# Altium PCB SSR.PcbDoc
Units mm, origin at the board's own origin, x right, y up, seen from the top; angles counter-clockwise.
Board outline 60 x 55 mm, 2 copper layers (Top Layer, Bottom Layer), stack 1.57 mm thick; 21 components, 15 nets, 48 pads, 4 vias.
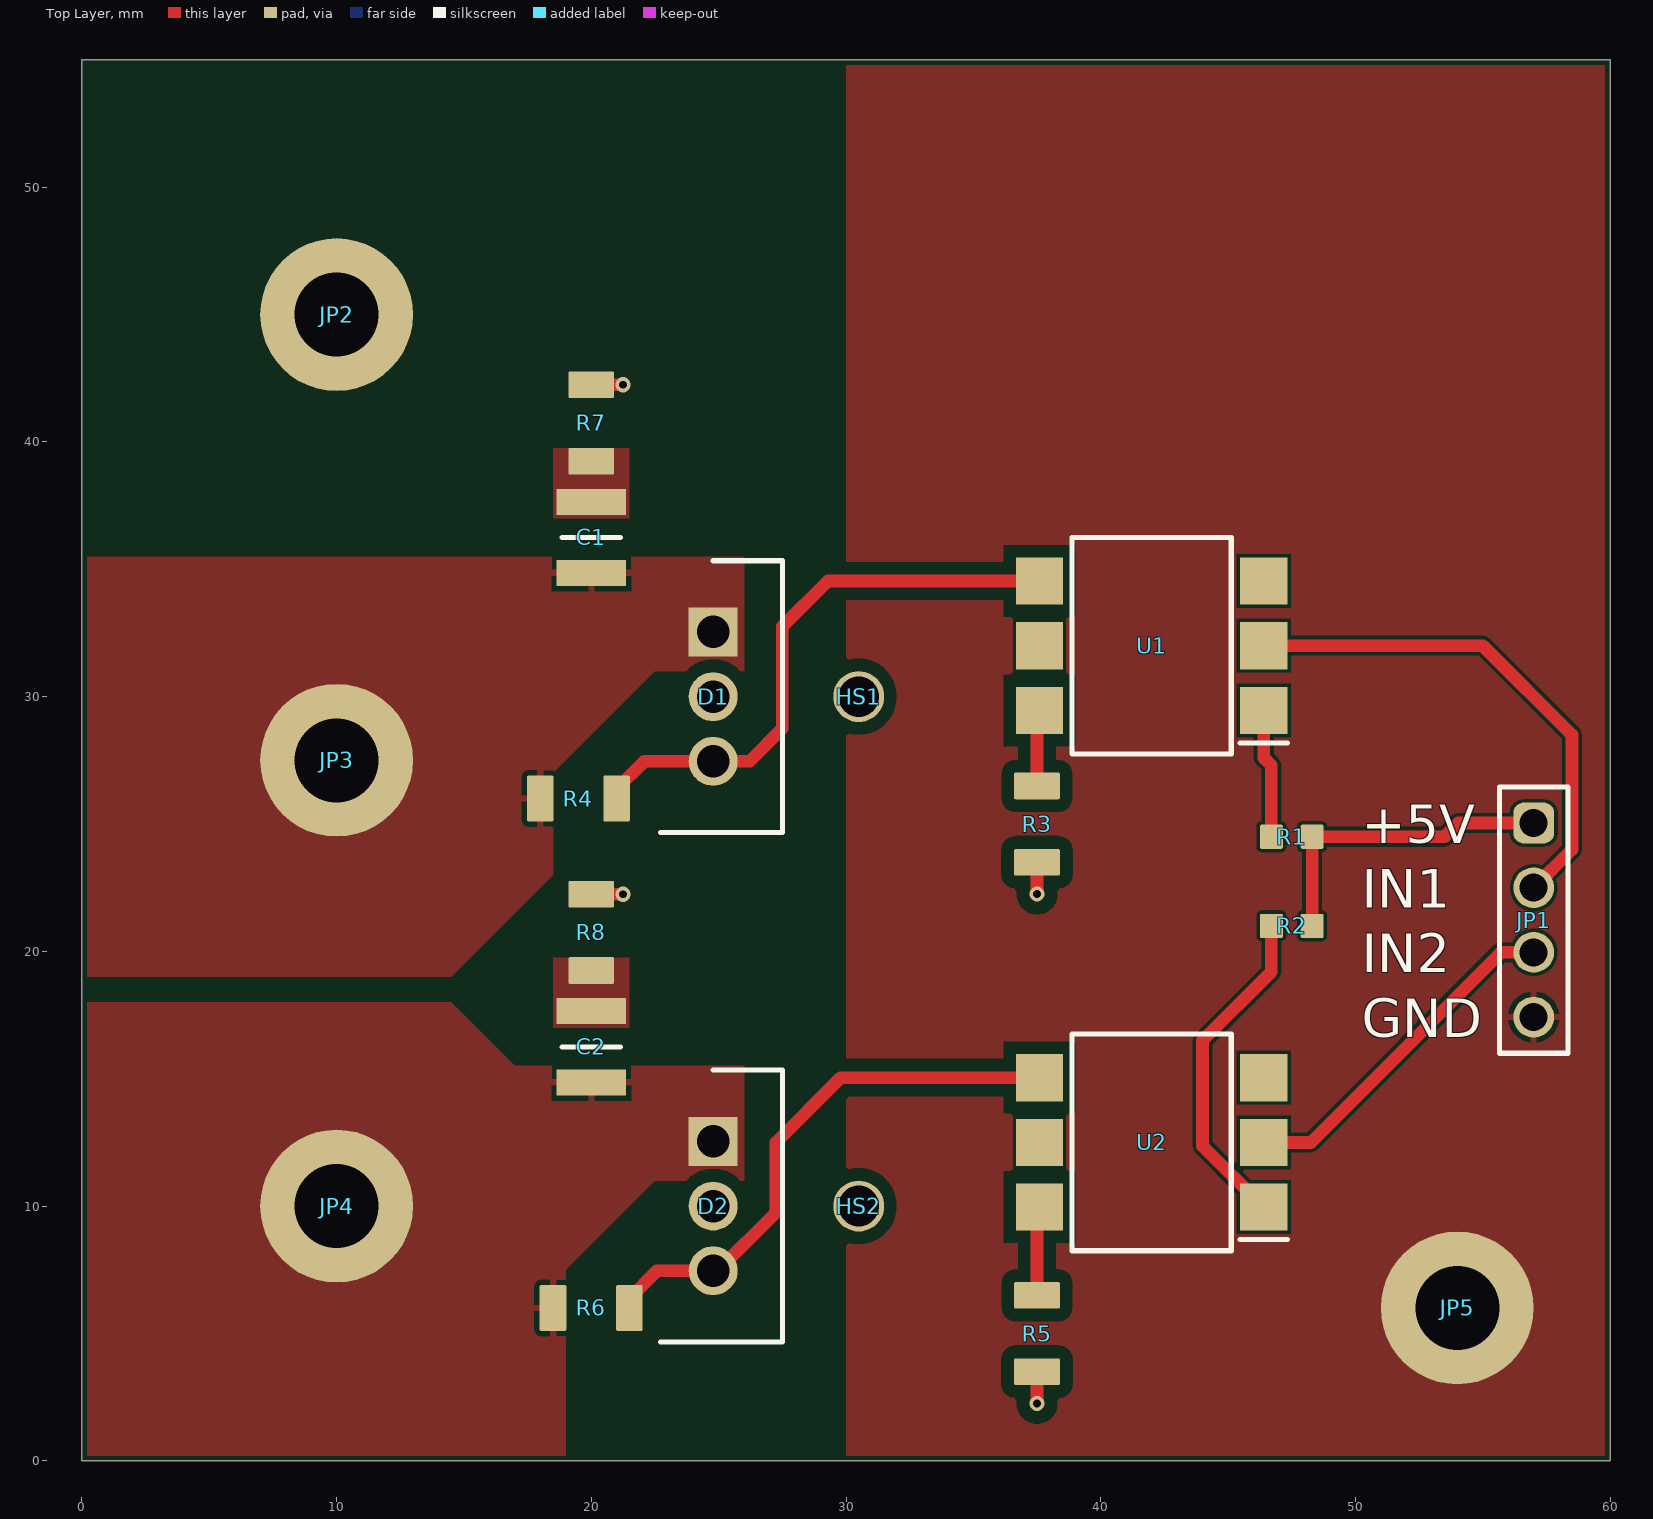
[diagram p0: Top Layer view]
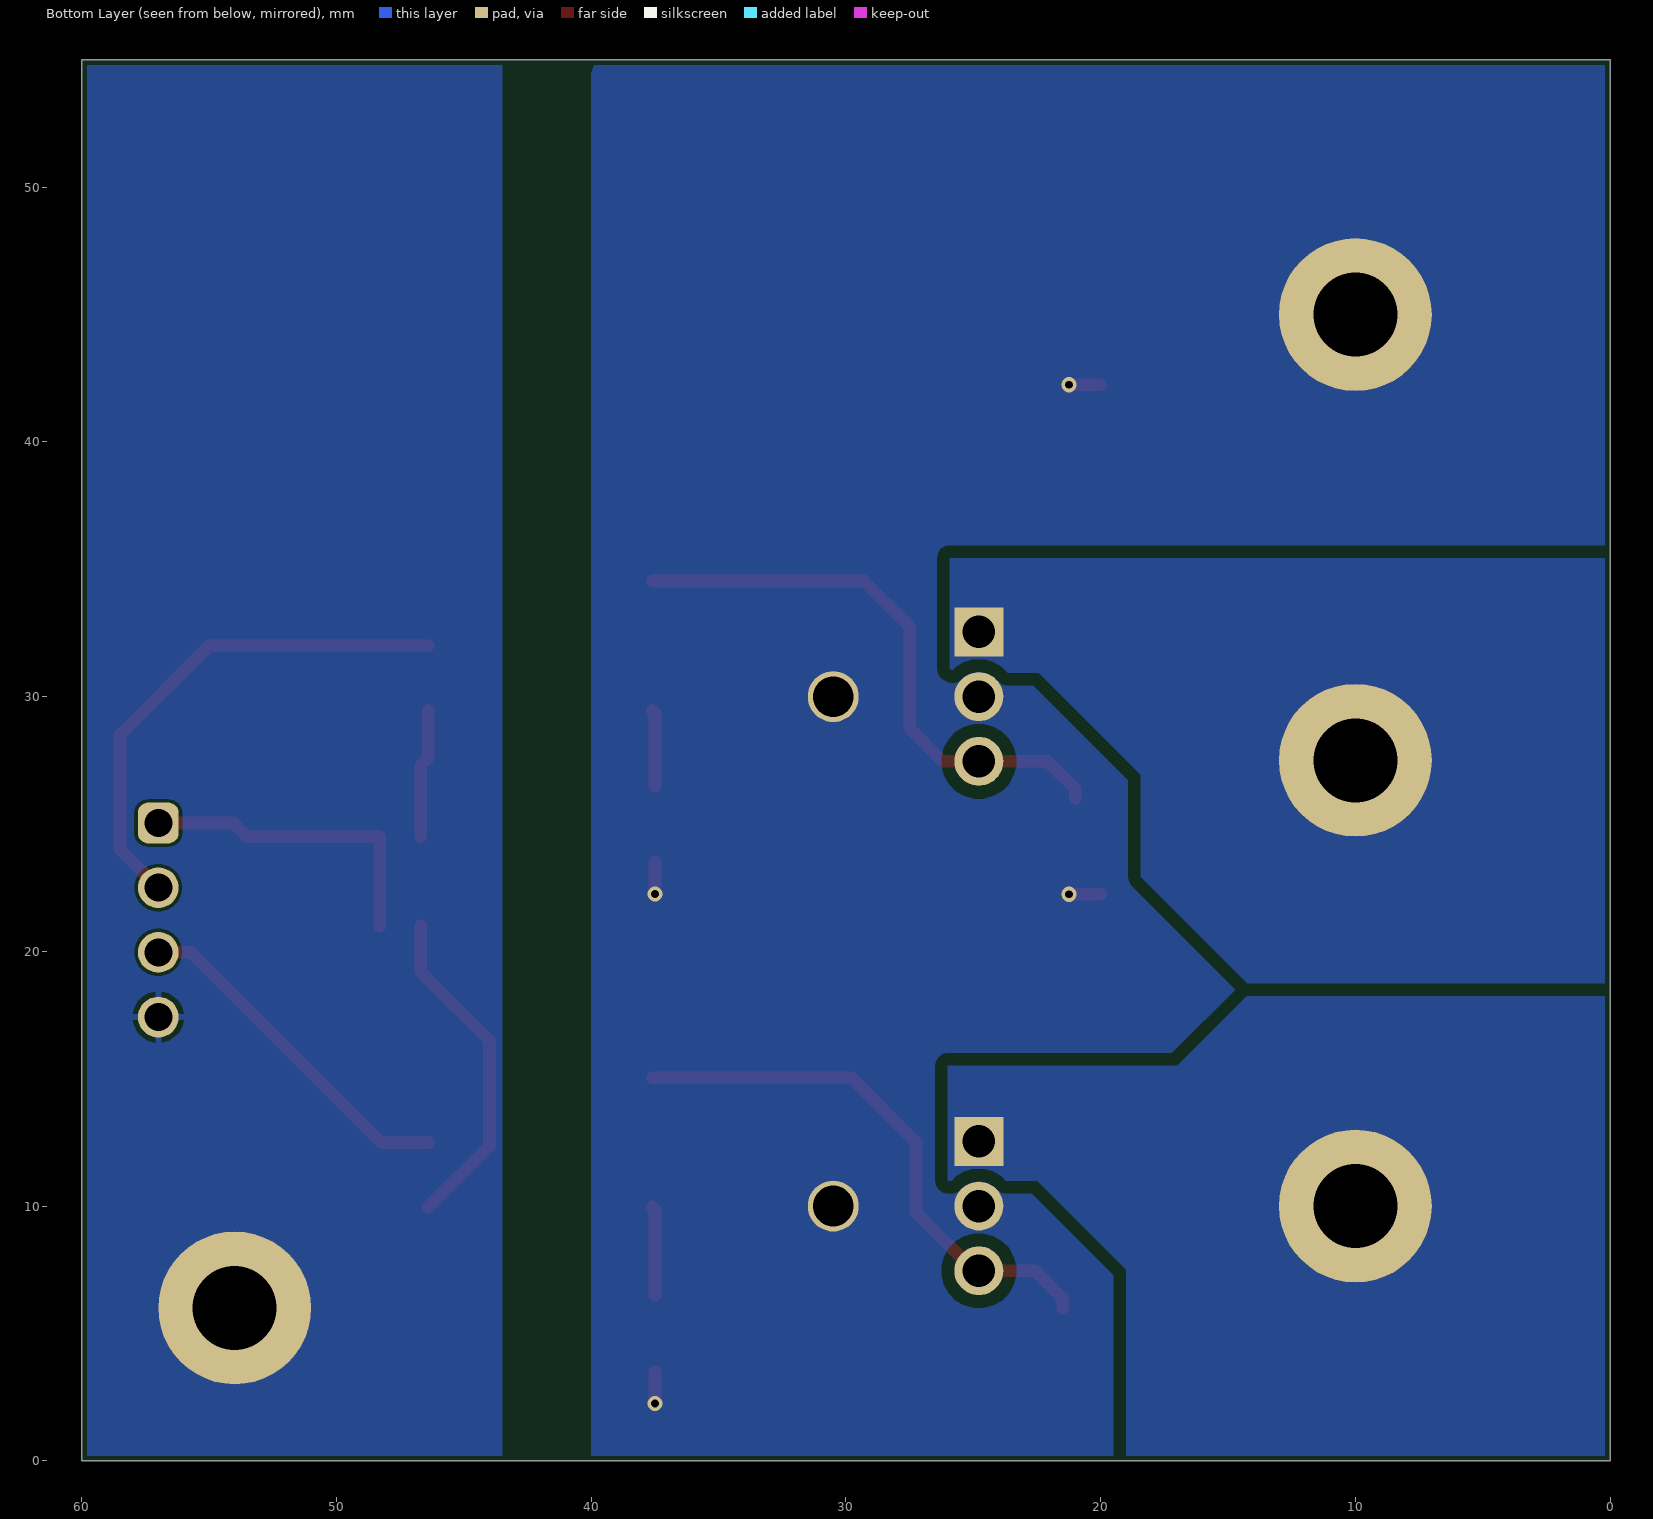
[diagram p1: Bottom Layer view, seen from below]
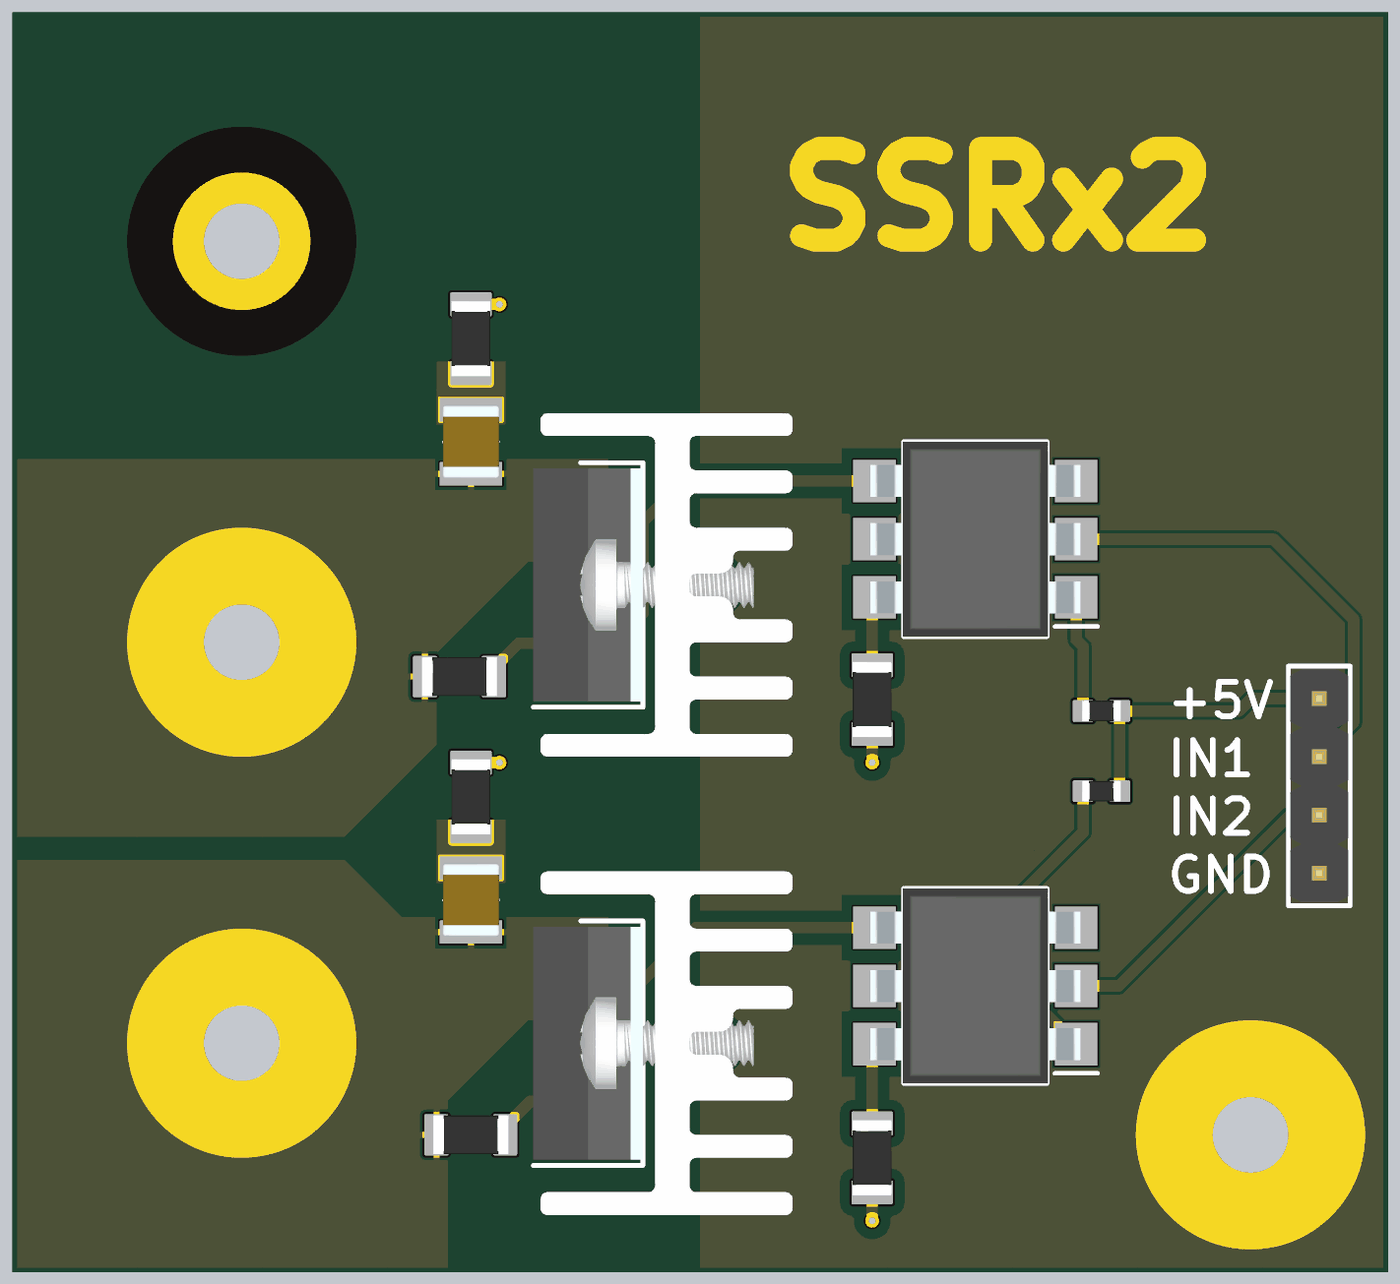
[diagram p2: 3D render of the assembled board from above, using the file's embedded part models]

## Layer stack, top to bottom
Top Solder: solder mask 0.0127, Solder Resist, Dk 3.8
Top Layer: signal copper 0.035
Dielectric: core 1.5, FR-4, Dk 4.5
Bottom Layer: signal copper 0.035
Bottom Solder: solder mask 0.0127, Solder Resist, Dk 3.8

## Board outline
0,0 0,55 60,55 60,0

## Design rules (kind name [scope] priority, off if disabled: settings)
BoardOutlineClearance [All] p1: gap=0.2 ignorepadtopadclearanceinfootprint=FALSE
Clearance Clearance_HV [InNetClass('HV')] p1: gap=0.5 ignorepadtopadclearanceinfootprint=FALSE
Clearance [All] p2: gap=0.127 ignorepadtopadclearanceinfootprint=FALSE except(0.25: Arc-Hole Track-Hole SMDPad-Hole THPad-Hole Via-Hole Fill-Hole Poly-Hole Region-Hole Text-Hole)
ComponentClearance [All] p1: gap=0.127 collisioncheckmode=3 verticalgap=0.127 showdistances=TRUE
DiffPairsRouting [All] p1: maxlimit=0.254 minlimit=0.127 mostfreqgap=0.127 toplayer_minwidth=0.127 toplayer_maxwidth=25.4 toplayer_prefwidth=0.127 bottomlayer_minwidth=0.127 bottomlayer_maxwidth=25.4 bottomlayer_prefwidth=0.127 maxuncoupledlength=12.7
Height [All] p1: minheight=0 maxheight=1816.048 prefheight=12.7
HoleSize [All] p1: absolutevalues=TRUE maxlimit=6.3 minlimit=0.3 maxpercent=80.000 minpercent=20.000
HoleToHoleClearance [All] p1: gap=0.25 allowstackedmicrovias=FALSE
MinimumAnnularRing [All] p1: minimumring=0.076
MinimumSolderMaskSliver [All] p1: minsoldermaskwidth=0
PlaneClearance [All] p1: clearance=0.127
PlaneConnect PlaneConnectPowerPads [InPadClass('PowerPads')] p1: planeconnectstyle=Direct reliefexpansion=0.508 reliefentries=4 reliefconductorwidth=0.254 reliefairgap=0.254
PlaneConnect [All] p2: pad.planeconnectstyle=Relief pad.reliefexpansion=0.3 pad.reliefentries=4 pad.reliefconductorwidth=0.127 pad.reliefairgap=0.127 via.planeconnectstyle=Direct via.reliefexpansion=0.3 via.reliefentries=4 via.reliefconductorwidth=0.127 via.reliefairgap=0.127
PolygonConnect M3 [HasFootprint('M3')] p1: connectstyle=Direct reliefconductorwidth=0.254 reliefentries=4 polygonreliefangle="90 Angle" airgapwidth=0.254
PolygonConnect SCR [HasFootprint('TO254P478X1016X1956-3P')] p2: connectstyle=Direct reliefconductorwidth=0.254 reliefentries=4 polygonreliefangle="90 Angle" airgapwidth=0.254
PolygonConnect HEATSINK [HasFootprint('HeatsinkTO220')] p3: connectstyle=Direct reliefconductorwidth=0.254 reliefentries=4 polygonreliefangle="90 Angle" airgapwidth=0.254
PolygonConnect SNUBBER1 [InNet('NetC1_2')] p4: connectstyle=Direct reliefconductorwidth=0.254 reliefentries=4 polygonreliefangle="90 Angle" airgapwidth=0.254
PolygonConnect SNUBBER2 [InNet('NetC2_2')] p5: connectstyle=Direct reliefconductorwidth=0.254 reliefentries=4 polygonreliefangle="90 Angle" airgapwidth=0.254
PolygonConnect [All] p6: thpad.connectstyle=Relief thpad.reliefconductorwidth=0.254 thpad.reliefentries=4 thpad.polygonreliefangle="90 Angle" thpad.airgapwidth=0.2 smdpad.connectstyle=Relief smdpad.reliefconductorwidth=0.254 smdpad.reliefentries=4 smdpad.polygonreliefangle="90 Angle" smdpad.airgapwidth=0.2 via.connectstyle=Direct via.reliefconductorwidth=0.127 via.reliefentries=4 via.polygonreliefangle="90 Angle" via.airgapwidth=0.127
RoutingVias [All] p1: holewidth=0.3 width=0.6 viastyle="Through Hole" minholewidth=0.3 minwidth=0.6 maxholewidth=0.6 maxwidth=6.6
SilkToSilkClearance [All] p1: silktosilkclearance=0
SilkToSolderMaskClearance [IsPad] p1: minsilkscreentomaskgap=0.127 clearancetoexposedcopper=TRUE
SolderMaskExpansion [All] p1: expansion=0.075 istentingtop=FALSE
Width [All] p1: maxlimit=25.4 minlimit=0.127 preferedwidth=0.127 minimp=50.000000 maximp=50.000000 favimp=50.000000
20 further rules are at their usual default settings.

## Classes and differential pairs
net class HV: L LOAD1 LOAD2 NetC1_2 NetC2_2 NetD1_3 NetD2_3 NetR3_1 NetR5_1 NetU1_5 NetU2_5

## Components (designator, comment, footprint, x,y, rotation, side; value= is the part's Value field where it differs from the comment)
C1 "C1210C103JBTACAUTO" CAPC3225X140N 20,36.25 r90 top
C2 "C1210C103JBTACAUTO" CAPC3225X140N 20,16.25 r90 top
D1 "Q6016LH4" TO254P478X1016X1956-3P 27.5,30 r270 top
D2 "Q6016LH4" TO254P478X1016X1956-3P 27.5,10 r270 top
HS1 "HeatsinkTO220" HeatsinkTO220 28,30 r0 top
HS2 "HeatsinkTO220" HeatsinkTO220 28,10 r0 top
JP1 "61300411121" 61300411121 57,21.23 r270 top
JP2 "Mounting M3" M3#1 10,45 r0 top
JP3 "Mounting M3" M3#2 9,33 r0 top
JP4 "Mounting M3" M3#3 8.5,8 r0 top
JP5 "Mounting M3" M3#1 54,6 r0 top
R1 "243R 1% 0,1W 75V 0603" "RES_0603_H050 (_IPC_MD)" 47.5,24.5 r180 top value=243R
R2 "243R 1% 0,1W 75V 0603" "RES_0603_H050 (_IPC_MD)" 47.5,21 r180 top value=243R
R3 "357R 1% 0,25W 200V 1206" "RES_1206_H060 (_IPC_MD)" 37.5,25 r270 top value=357R
R4 "357R 1% 0,25W 200V 1206" "RES_1206_H060 (_IPC_MD)" 19.5,26 r180 top value=357R
R5 "357R 1% 0,25W 200V 1206" "RES_1206_H060 (_IPC_MD)" 37.5,5 r270 top value=357R
R6 "357R 1% 0,25W 200V 1206" "RES_1206_H060 (_IPC_MD)" 20,6 r180 top value=357R
R7 "39.2R 1% 0,25W 200V 1206" "RES_1206_H060 (_IPC_MD)" 20,40.75 r270 top value=39.2R
R8 "39.2R 1% 0,25W 200V 1206" "RES_1206_H060 (_IPC_MD)" 20,20.75 r270 top value=39.2R
U1 "MOC3061SR2M" SOT254P916X508-6N 42,32 r180 top
U2 "MOC3061SR2M" SOT254P916X508-6N 42,12.5 r180 top

## Footprints (in the part's own frame and the unit in brackets; to place one, negate y for a bottom-side part, rotate by r counter-clockwise, add the part's x,y. Pads: shape width x height; smd on the part's side, far side on the other; paste and mask are expansions set on the pad)
61300411121 [mm] "Pin Header, pitch 2.54 mm, THT, Vertical, single row, 4p"
  rrect50% 1.6x1.6 hole 1.1: 1(-3.81,0)
  round 1.6 hole 1.1: 2(-1.27,0) 3(1.27,0) 4(3.81,0)
  silkscreen extent -5.23,-1.35 5.23,1.35, body extent -5.08,-1.27 5.08,1.27, height 8.57
CAPC3225X140N [mm]
  rect 1.02x2.72 smd: 1(-1.4,0) 2(1.4,0)
  silkscreen extent 0,-1.15 0,1.15, body extent -1.6,-1.25 1.6,1.25, height 1.4
HeatsinkTO220 [mm] "TO220 heatsink"
  round 2 hole 1.6 mask+0: 0(2.5,0)
  body extent -4.97,-7.5 6.03,7.5, height 20
M3#1 [mm]
  round 6 hole 3.3 mask+2: 1(0,0)
M3#2 [mm]
  round 6 hole 3.3 mask+2: 1(1,-5.5)
M3#3 [mm]
  round 6 hole 3.3 mask+2: 1(1.5,2)
"RES_0603_H050 (_IPC_MD)" [mm]
  rrect14% 0.9x0.95 smd paste+0 mask+0.1: 1(-0.8,0) 2(0.8,0)
  body extent -0.85,-0.45 0.85,0.45, height 0.55
"RES_1206_H060 (_IPC_MD)" [mm]
  rrect12% 1.05x1.8 smd paste+0 mask+0.1: 1(-1.495,0) 2(1.505,0)
  body extent -1.65,-0.85 1.65,0.85, height 0.65
SOT254P916X508-6N [mm]
  rect 1.85x1.85 smd: 1(-4.4,2.54) 2(-4.4,0) 3(-4.4,-2.54) 4(4.4,-2.54) 5(4.4,0) 6(4.4,2.54)
  silkscreen extent -5.33,-4.26 3.13,4.26, body extent -4.58,-4.26 4.58,4.26, height 5.08
TO254P478X1016X1956-3P [mm]
  rect 1.92x1.92 hole 1.28: 1(-2.54,-2.715)
  round 1.92 hole 1.28: 2(0,-2.715) 3(2.54,-2.715)
  silkscreen extent -5.34,-4.78 5.34,0, body extent -5.08,-4.78 5.08,0, height 19.41

## Part data
C1 C2: "Capacitor", Manufacturer_Name=Kemet, Mouser Part Number=80-C1210C103JBTAUTO, Datasheet Link=https://www.kemet.com/specsheet/C1210C103JBTACAUTO, Height=1.4mm, Manufacturer_Part_Number=C1210C103JBTACAUTO, Mouser Price/Stock=https://www.mouser.co.uk/ProductDetail/KEMET/C1210C103JBTACAUTO?qs=QNEnbhJQKvaXscHrCOz9wA%3D%3D
D1 D2: "Thyristor", Manufacturer_Name=LITTELFUSE, Datasheet Link=https://www.littelfuse.com/~/media/electronics/datasheets/switching_thyristors/littelfuse_thyristor_qxx15xx_qxx16xhx_datasheet.pdf.pdf, Height=4.78mm, Manufacturer_Part_Number=Q6016LH4
HS1 HS2: "Simple model for a cheap Aliexpress 20*15*11 TO-220 pure aluminium heat sink", Temp=I, Component=HeatsinkTO220, Part Number=HeatsinkTO220, Qty=1, Supplier 1=Arrow, Supplier 2=Avnet, Supplier 3=Digi-Key, Supplier 4=Distrelec, Supplier 5=Farnell, Supplier 6="Future Electronics", Supplier 7=Mouser, Supplier 8=RSComponents, Supplier 9=Rutronik, Supplier 10=TTI, Type=Mechanical
JP1: "WR-PHD Pin Header, THT, pitch 2.54mm, Single Row, Vertical, 4p", Contact Resistance=20mOhm, Manufacturer="Wurth Elektronik", Operating Temperature="-40 to +105degC", Rated Current=3A, Withstanding Voltage=500VAC, Working Voltage=250VAC, ComponentLink1Description=Manufacturer, ComponentLink1URL=http://www.we-online.de, ComponentLink2Description=Datasheet, ComponentLink2URL=https://www.we-online.com/catalog/datasheet/61300411121.pdf, Gender="Pin Header", Manufacturer Part Number=61300411121, Mounting Technology=THT, Orientation=Vertical, Packaging=Bag, Pin Number=4, Pitch=2.54mm, Row Number=Single
JP2 JP3 JP4 JP5: library part CONNM3
R1 R2: library part RES243R1%0603, Volt=75V, Part Number=RES243R1%0603, PCB Lib=MUAB_RES.PcbLib, Qty=1, Scm Lib=Discrete.SchLib, Supplier 1=Arrow, Supplier 2=Avnet, Supplier 3=Digi-Key, Supplier 4=Distrelec, Supplier 5=Farnell, Supplier 6="Future Electronics", Supplier 7=Mouser, Supplier 8=RSComponents, Supplier 9=Rutronik, Supplier 10="SEED OPL", Tol=1%, Type=Standard, Watt=0,1W
R3 R4 R5 R6: library part RES357R1%1206, Volt=200V, Part Number=RES357R1%1206, PCB Lib=MUAB_RES.PcbLib, Qty=1, Scm Lib=Discrete.SchLib, Supplier 1=Arrow, Supplier 2=Avnet, Supplier 3=Digi-Key, Supplier 4=Distrelec, Supplier 5=Farnell, Supplier 6="Future Electronics", Supplier 7=Mouser, Supplier 8=RSComponents, Supplier 9=Rutronik, Supplier 10="SEED OPL", Tol=1%, Type=Standard, Watt=0,25W
R7 R8: library part RES39.2R1%1206, Volt=200V, Part Number=RES39.2R1%1206, PCB Lib=MUAB_RES.PcbLib, Qty=1, Scm Lib=Discrete.SchLib, Supplier 1=Arrow, Supplier 2=Avnet, Supplier 3=Digi-Key, Supplier 4=Distrelec, Supplier 5=Farnell, Supplier 6="Future Electronics", Supplier 7=Mouser, Supplier 8=RSComponents, Supplier 9=Rutronik, Supplier 10="SEED OPL", Tol=1%, Type=Standard, Watt=0,25W
U1 U2: "Integrated Circuit", Manufacturer_Name="ON Semiconductor", Mouser Part Number=512-MOC3061SR2M, Arrow Part Number=MOC3061SR2M, Arrow Price/Stock=https://www.arrow.com/en/products/moc3061sr2m/on-semiconductor?region=nac, Datasheet Link=http://www.onsemi.com/pub/Collateral/MOC3163M-D.pdf, Height=5.08mm, Manufacturer_Part_Number=MOC3061SR2M, Mouser Price/Stock=https://www.mouser.co.uk/ProductDetail/ON-Semiconductor-Fairchild/MOC3061SR2M?qs=QsyUFYHC2%2FbVF%2F%252BX5tJ1cA%3D%3D

## Via types
v1: diameter 0.6, hole 0.3, Top Layer to Bottom Layer, 4 vias

## Nets (pads, with @x,y where several pads share a name; then routed paths per layer and width w, separated by ;. In a path a pad name is that pad's centre, name@x,y a point inside that pad or via, vN(x,y) a via of type N, cw(c..) or ccw(c..) an arc to the next point about the centre after c; other vN are vias at no path point)
5V: JP1.1 R1.1 R2.1 | length 12.4
  Top Layer w0.5: R2.1 R1.1 53.5,24.5 54.04,25.04 JP1.1
GND: JP1.4 JP5.1
IN1: JP1.2 U1.2 | length 20.2
  Top Layer w0.5: U1.2 55,32 58.5,28.5 58.5,24 JP1.2
IN2: JP1.3 U2.2 | length 13.7
  Top Layer w0.5: U2.2 48.25,12.5 55.71,19.96 JP1.3
L: D1.2 D2.2 HS1.0 HS2.0 JP2.1 R3.2 R5.2 R7.1 R8.1 | length 5
  Top Layer w0.5: R8.1 v1(21.245,22.245) ; R7.1 v1(21.245,42.245) ; v1(37.5,2.25) R5.2 ; v1(37.5,22.25) R3.2
LOAD1: C1.1 D1.1 JP3.1 R4.2
LOAD2: C2.1 D2.1 JP4.1 R6.2
NetC1_2: C1.2 R7.2
NetC2_2: C2.2 R8.2
NetD1_3: D1.3 R4.1 U1.4 | length 22.7
  Top Layer w0.5: R4.1 20.995,26.375 22.08,27.46 26.21,27.46 27.5,28.75 27.5,32.75 29.29,34.54 U1.4
NetD2_3: D2.3 R6.1 U2.4 | length 21.7
  Top Layer w0.5: R6.1 21.495,6.375 22.58,7.46 D2.3 24.96,7.46 27.25,9.75 27.25,12.5 29.79,15.04 U2.4
NetR1_2: R1.2 U1.1 | length 5.1
  Top Layer w0.5: U1.1 46.4,27.6 46.7,27.3 R1.2
NetR2_2: R2.2 U2.1 | length 13.2
  Top Layer w0.5: U2.1 44,12.36 44,16.5 46.7,19.2 R2.2
NetR3_1: R3.1 U1.6 | length 3
  Top Layer w0.5: R3.1 37.5,29.36 U1.6
NetR5_1: R5.1 U2.6 | length 3.5
  Top Layer w0.5: R5.1 37.5,9.86 U2.6
pads on no net: U1.3 U1.5 U2.3 U2.5

## Polygon pours and split planes (outlines as drawn)
GND on Bottom Layer "GND_L02_P000" (solid, pour order 0): 43.5,0 60,0 60,55 43.5,55
L on Bottom Layer "L_L02_P007" (solid, pour order 7): 0,55 40.5,55 40,54.5 40,0 0,0
LOAD2 on Bottom Layer "LOAD2_L02_P004" (solid, pour order 4): 26,15.5 17,15.5 14.25,18.25 0,18.25 0,0 19,0 19,7.5 22.5,11 26,11
LOAD1 on Bottom Layer "LOAD1_L02_P003" (solid, pour order 3): 25.936,30.936 25.936,35.437 -0.064,35.437 -0.064,18.75 14.25,18.75 18.437,22.936 18.437,26.936 22.437,30.936
GND on Top Layer "GND_L01_P008" (solid, pour order 8): 60,0 30,0 30,55 60,55
NetC2_2 on Top Layer "NETC2_2_L01_P006" (solid, pour order 6): 18.5,17 21.5,17 21.5,19.75 18.5,19.75
NetC1_2 on Top Layer "NETC1_2_L01_P005" (solid, pour order 5): 18.5,37 21.5,37 21.5,39.75 18.5,39.75
LOAD2 on Top Layer "LOAD2_L01_P002" (solid, pour order 2): 26,15.5 17,15.5 14.5,18 0,18 0,0 19,0 19,7.5 22.5,11 26,11
LOAD1 on Top Layer "LOAD1_L01_P001" (solid, pour order 1): 26,31 26,35.5 0,35.5 0,19 14.5,19 18.5,23 18.5,27 22.5,31

## Silkscreen, mask and mechanical layers (free items; w line width, h text height)
Top Overlay:
  text "+5V" at 50.254,24.254 h1.5
  text "IN1" at 50.254,21.714 h1.5
  text "IN2" at 50.254,19.174 h1.5
  text "GND" at 50.254,16.634 h1.5
Top Solder:
  text "SSRx2" at 33,45 h4
Mechanical 1:
  the board outline again, w0.254